# Altium PCB FlightController_Top_6x6.PcbDoc (part 1 of 6)
Units mm, origin at the board's own origin, x right, y up, seen from the top; angles counter-clockwise.
Board outline 149.8 x 149.8 mm, 2 copper layers (Top Layer, Bottom Layer); 156 components, 166 nets, 860 pads, 423 vias.
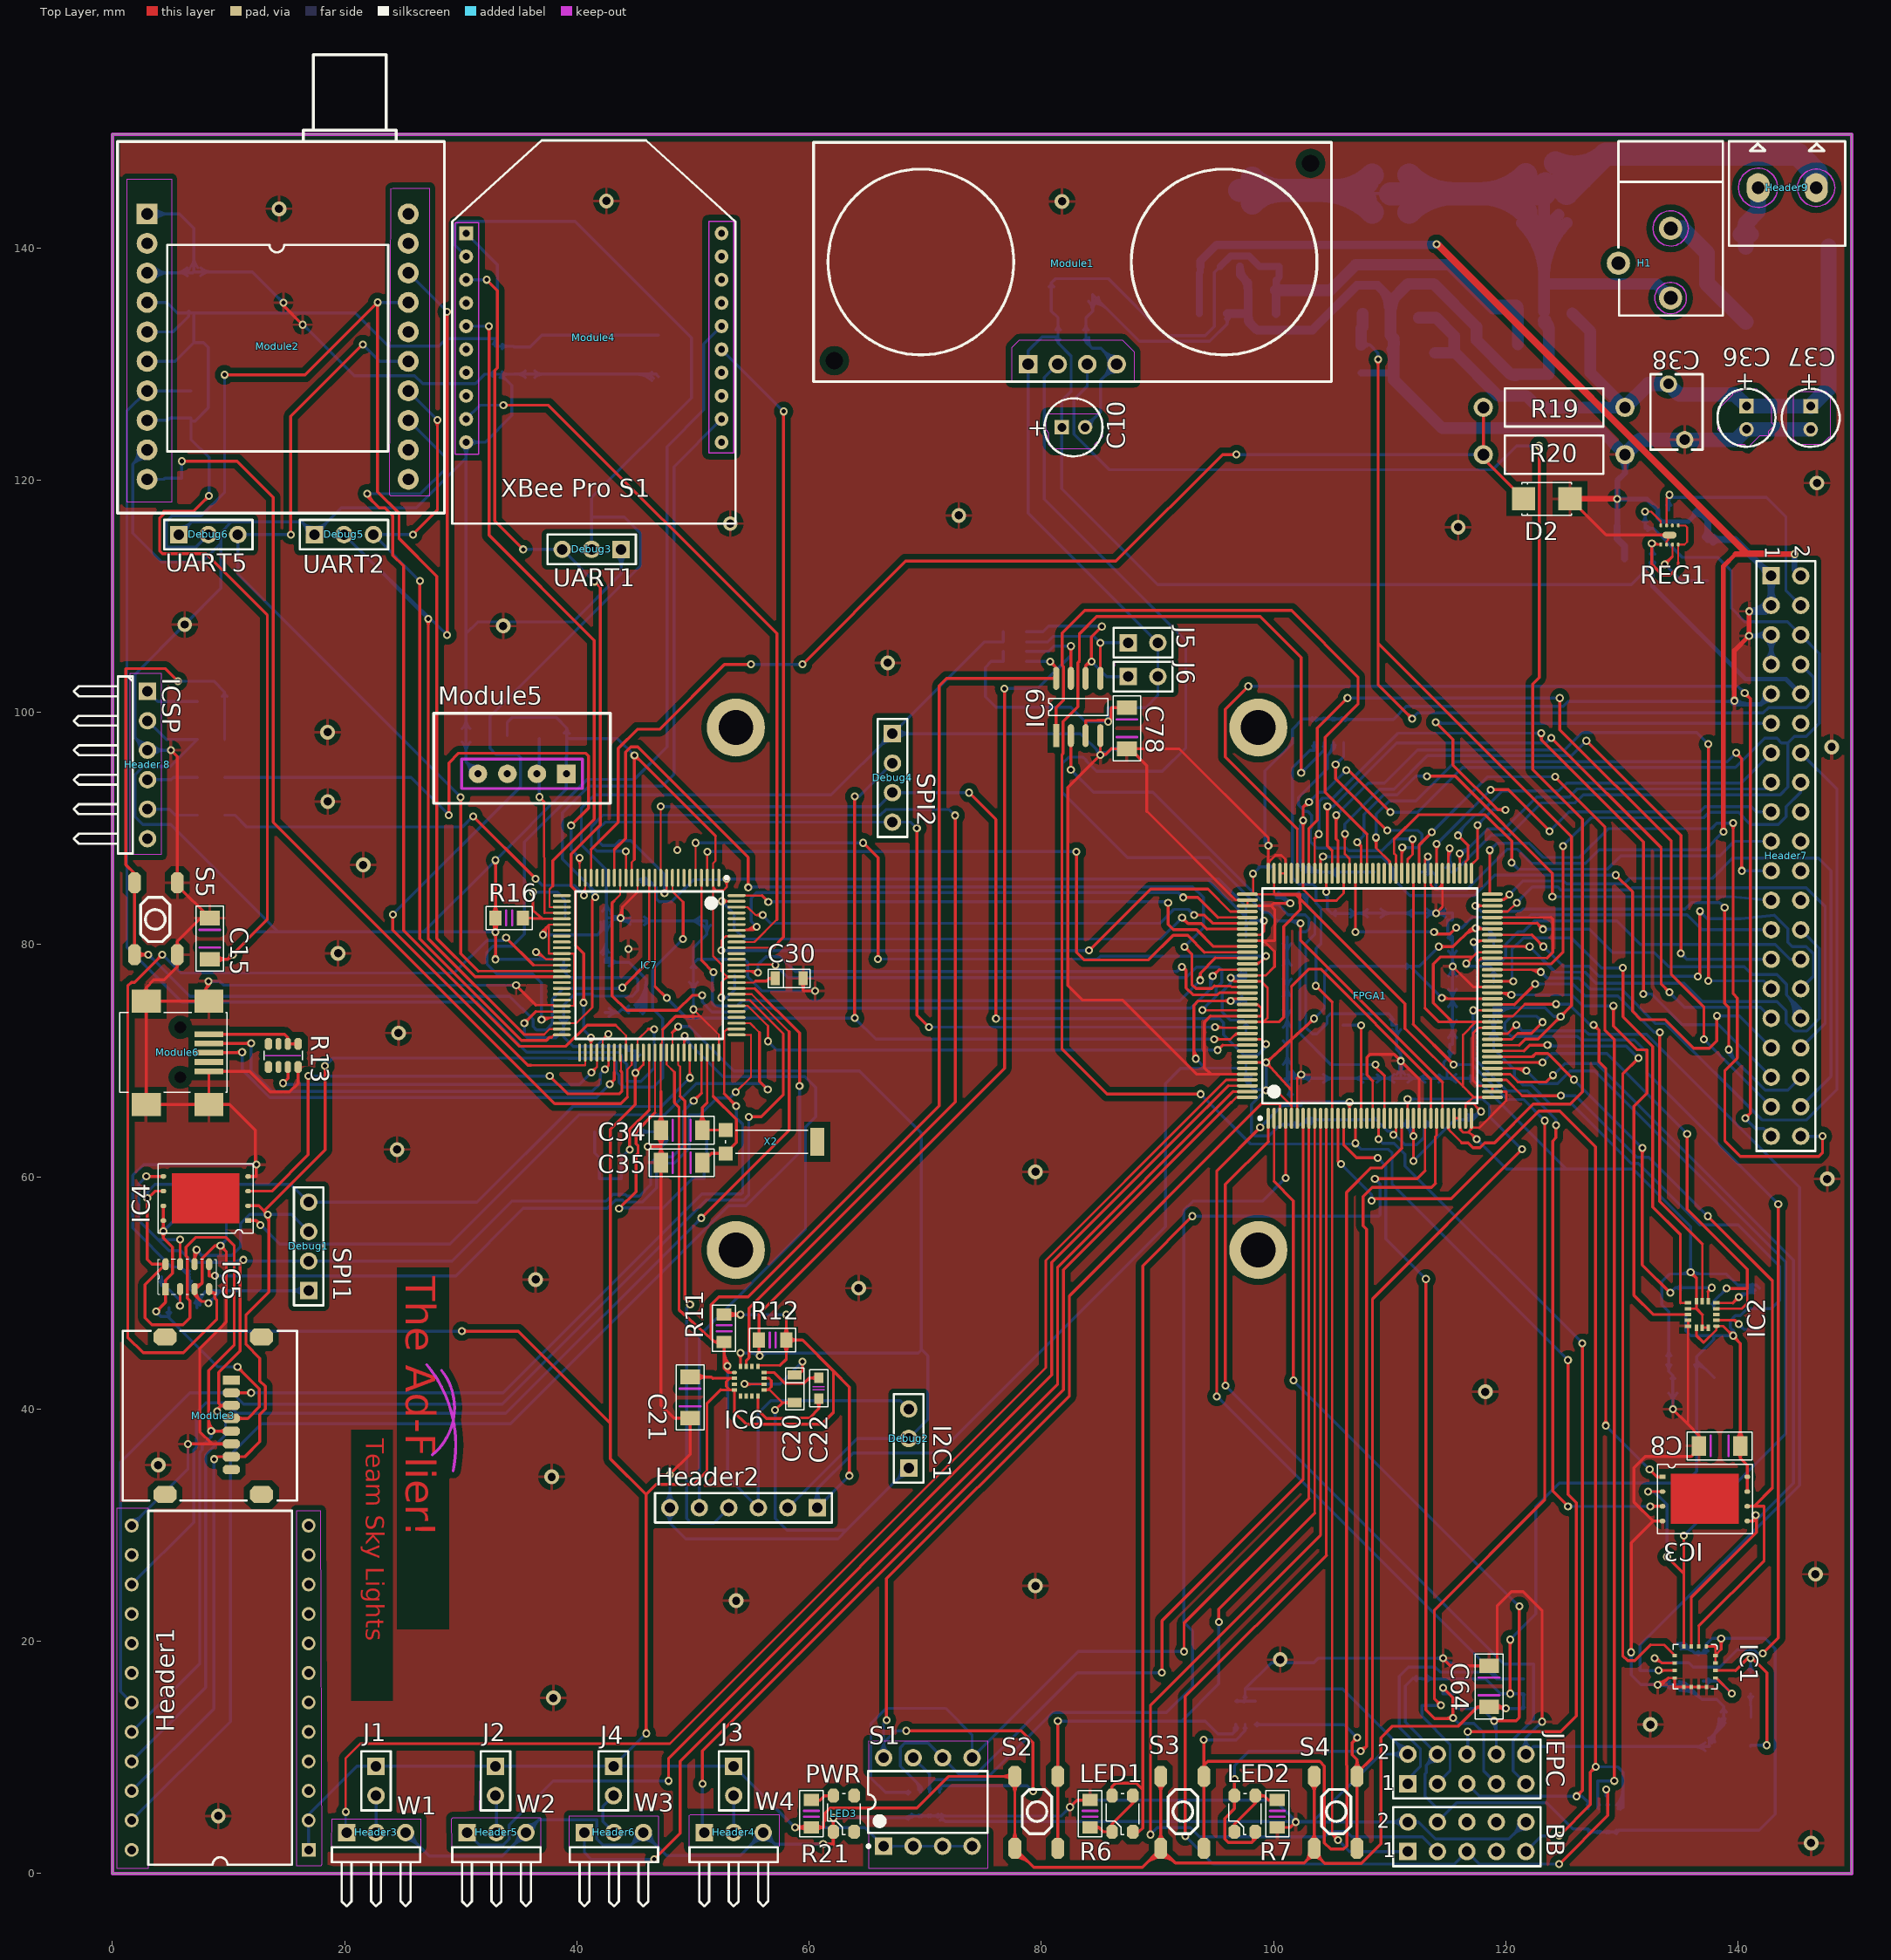
[diagram p0: Top Layer view]
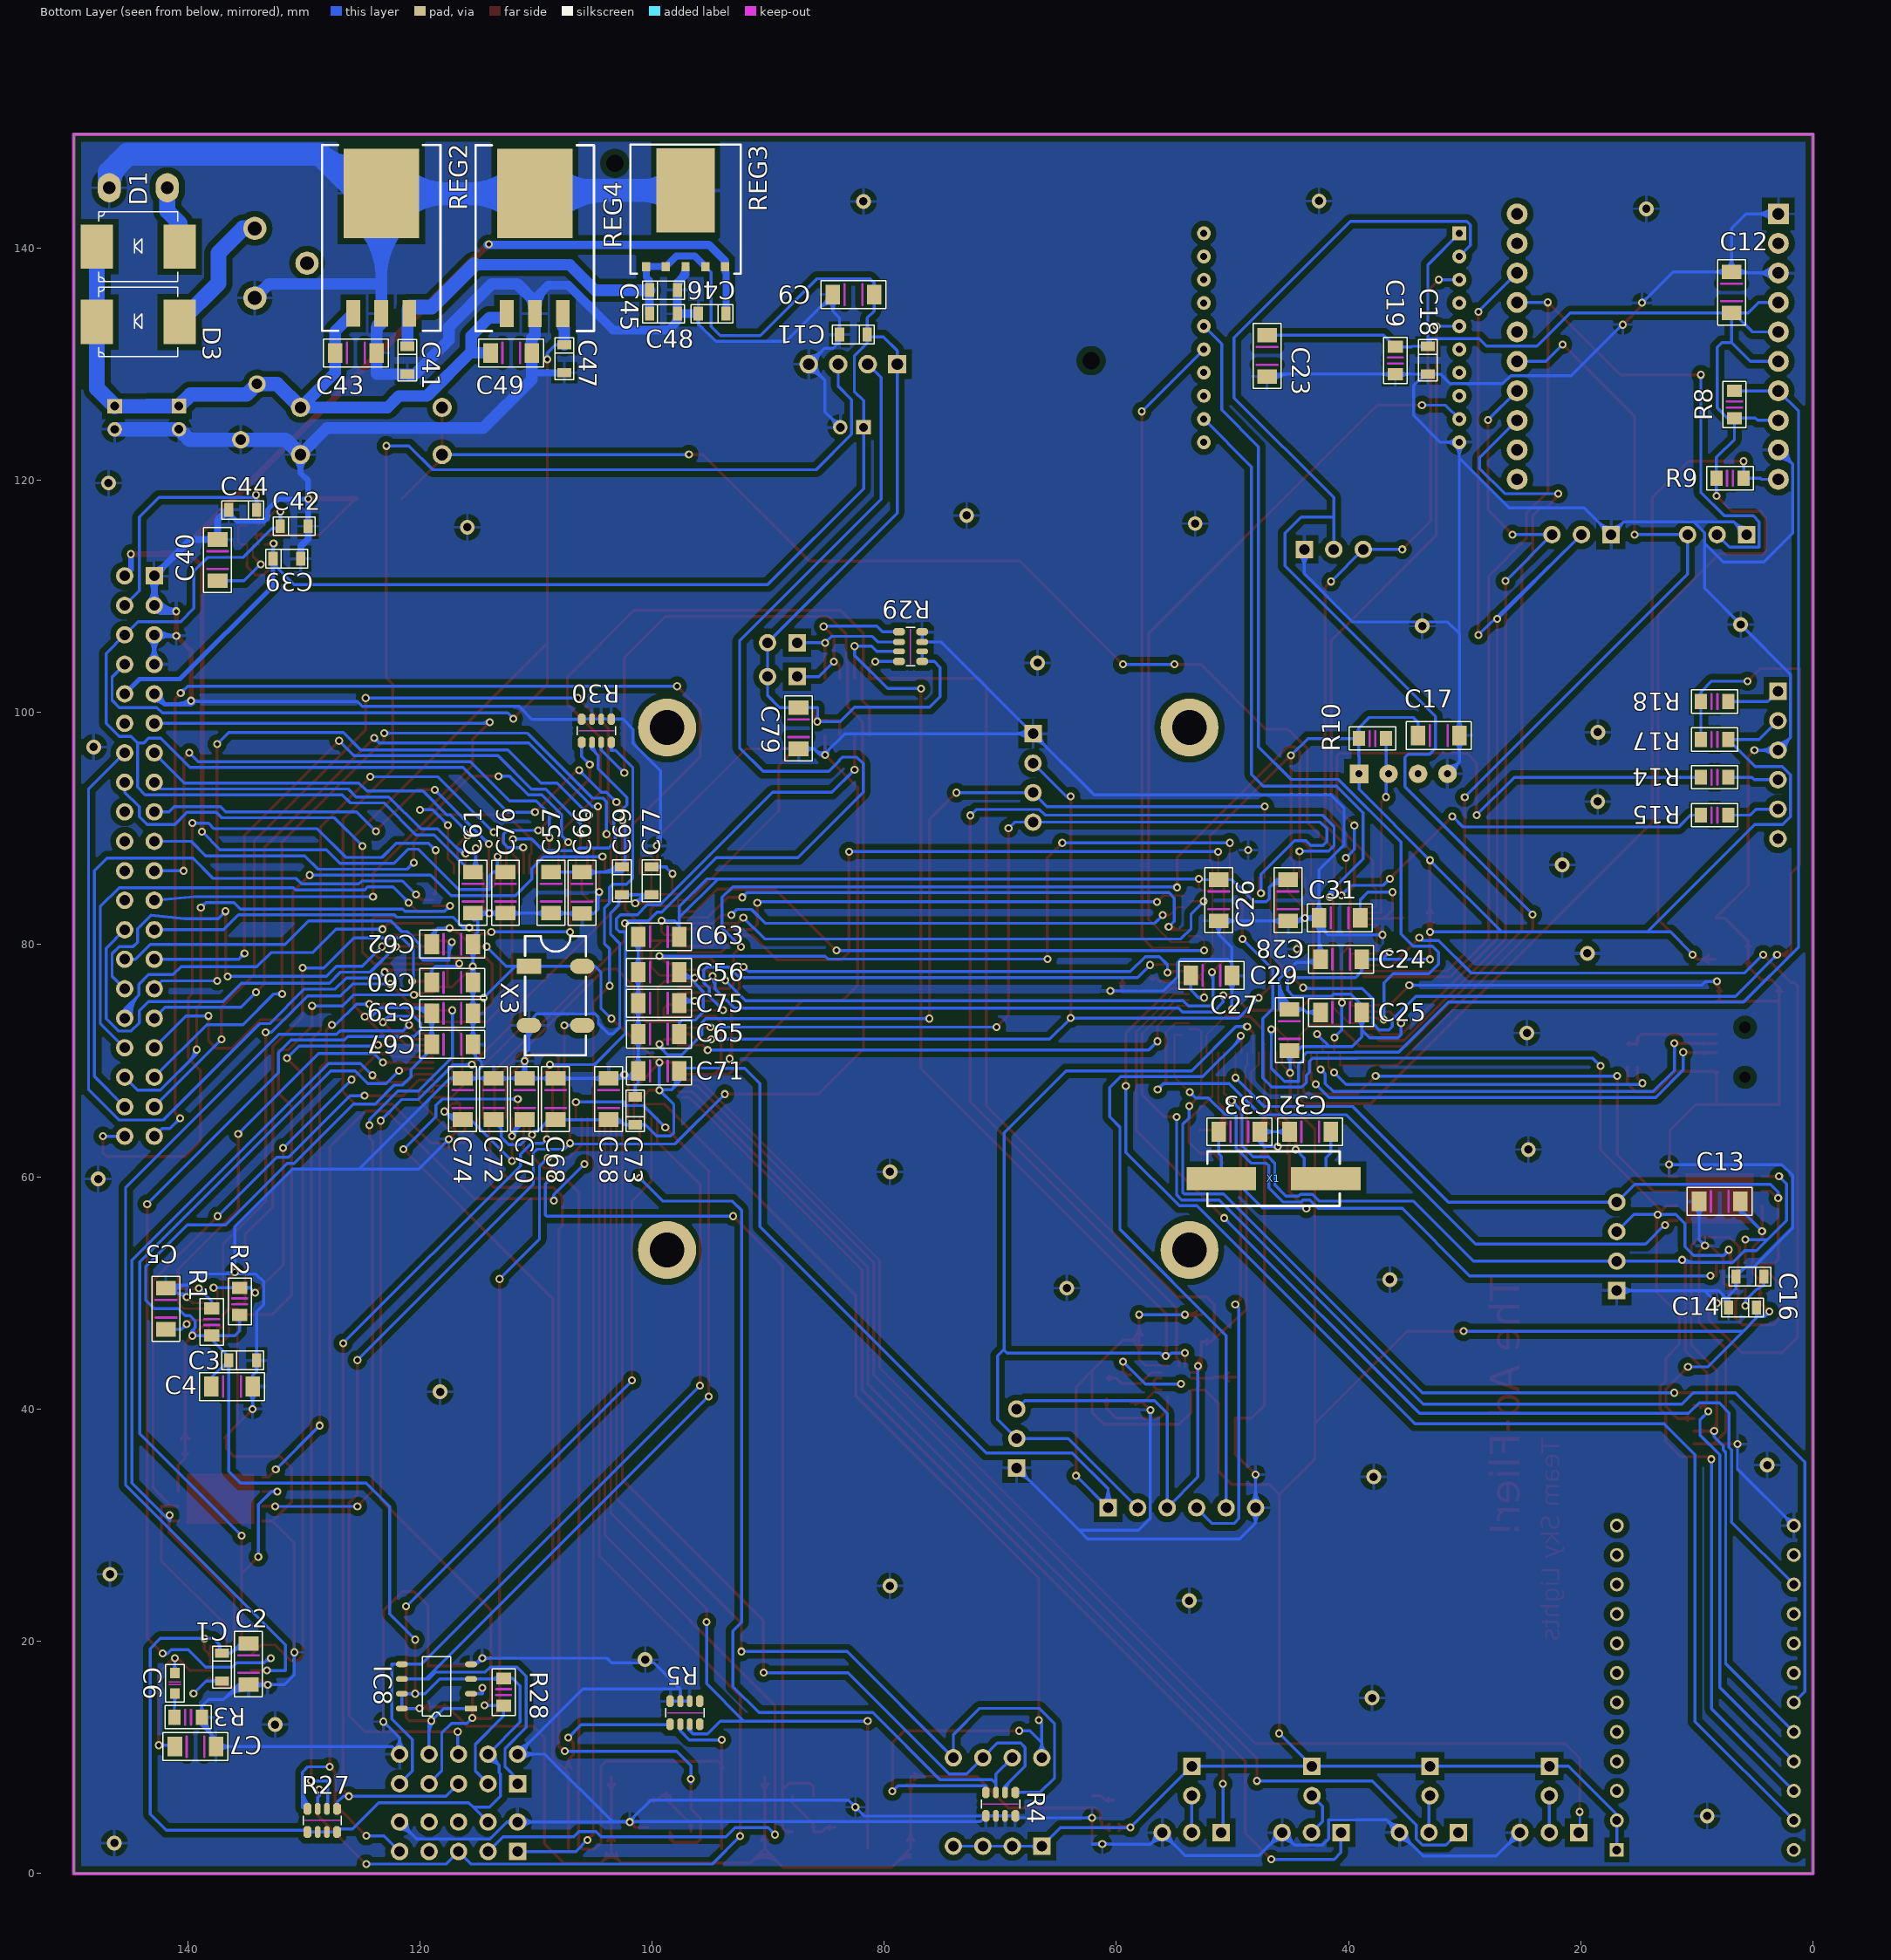
[diagram p1: Bottom Layer view, seen from below]

## Layer stack, top to bottom
Top Layer: signal copper 0.0356
Dielectric: dielectric 0.32, FR-4, Dk 4.8
Bottom Layer: signal copper 0.0356

## Board outline
0,0 149.8,0 149.8,149.8 0,149.8

## Design rules (kind name [scope] priority, off if disabled: settings)
Clearance Clearance_IsRegion [IsRegion] p1: gap=0.5
Clearance Clearance_IsPad [IsPad] p2: gap=0.2
Clearance [All] p3: gap=0.254
ComponentClearance [All] p1: gap=0.154 collisioncheckmode=3 verticalgap=0.154 showdistances=FALSE
DiffPairsRouting [All] p1: maxlimit=0.254 minlimit=0.254 mostfreqgap=0.254 maxuncoupledlength=12.7
FanoutControl Fanout_Default [All] p5: bgadir=Out bgaviamode=Centered fanoutstyle=Auto fanoutdirection=OutOnly viagrid=0.025 // Fanout_Default (Default Rule)
HoleSize [All] p1: absolutevalues=TRUE maxlimit=3 minlimit=0.381 maxpercent=80.000 minpercent=20.000
MinimumAnnularRing [Not IsVia] p1: minimumring=0.178
MinimumSolderMaskSliver [All] p1: minsoldermaskwidth=0.152
PolygonConnect [All] p1: connectstyle=Relief reliefconductorwidth=0.254 reliefentries=4 polygonreliefangle="90 Angle"
RoutingPriority RoutingPriority_Power [InNet('+3.3V') OR InNet('GND')] p1: routingpriority=0
RoutingPriority [All] p2: routingpriority=1
RoutingVias [All] p1: holewidth=0.381 width=0.686 viastyle="Through Hole" minholewidth=0.381 minwidth=0.686 maxholewidth=0.381 maxwidth=0.686
SMDNeckDown [All] p1: percent=70.000
SilkToSilkClearance [All] p1: silktosilkclearance=0.1
SilkscreenOverComponentPads [All] p1: minsilkscreentomaskgap=0.1
SolderMaskExpansion [All] p1: expansion=0
ViasUnderSMD [All] p1: allowed=FALSE
Width [All] p1: maxlimit=2 minlimit=0.154 preferedwidth=0.254 minimp=50.000000 maximp=50.000000 favimp=50.000000
20 further rules are at their usual default settings.

## Classes and differential pairs
component class "Components Class 1": C78 C79 IC9 J5 J6 R29
component class Power: 2 C36 C37 C38 C39 C40 C41 C42 C44 C45 C46 C47 C48 C49 D1 D2 D3 H1 Header9 LED3 R19 R20 R21 REG1 REG3 REG4
component class Navigator_Core: C24 C25 C26 C27 C28 C29 C30 C31 C32 C33 C34 C35 IC7 R16 R17 R18 S5 X1 X2
component class Navigator_Connectors: C23 Debug1 Debug2 Debug3 Debug4 Debug5 Debug6 "Header 8" Module6 R13 R14 R15
component class Navigator_Components: C12 C13 C14 C15 C16 C17 C18 C19 C20 C21 C22 Header1 Header2 IC4 IC5 IC6 Module2 Module3 Module4 Module5 R8 R9 R10 R11 R12
component class FPGA_Core: Header7
component class FPGA_Components: C1 C2 C3 C4 C5 C6 C7 C8 C9 C10 C11 Header3 Header4 Header5 Header6 IC1 IC2 IC3 J1 J2 J3 J4 LED1 LED2 Module1 R1 R2 R3 R4 R5 R6 R7 S1 S2 S3 S4
component class FPGA_Clocks: BB C56 C57 C58 C59 C60 C61 C62 C63 C64 C65 C66 C67 C68 C69 C70 C71 C72 C73 C74 C75 C76 C77 C78 C79 IC8 IC9 J5 J6 JEPC R27 R28 R29 R30 X3
net class Power: +3.3V GND
net class Other: 25MHZ_CLOCK +1.2V +1.5V +2.8V +5.0V ACCEL_INT1 ACCEL_INT2 ACCEL_SA0 ACCEL_SCL ACCEL_SDA ASDO BAROMETER_/CS BAROMETER_/SHDN BAROMETER_DIN BAROMETER_DOUT BAROMETER_SCLK BLED_BLUE1 BLED_BLUE2 BLED_BLUE3 BLED_BLUE4 BLED_ORANGE1 BLED_ORANGE2 BLED_ORANGE3 BLED_ORANGE4 BULTRASONIC_EDGE BULTRASONIC_TRIGGER CAMERA_DCLK CAMERA_DOUT0 CAMERA_DOUT1 CAMERA_DOUT2 CAMERA_DOUT3 CAMERA_DOUT4 CAMERA_DOUT5 CAMERA_DOUT6 CAMERA_DOUT7 CAMERA_EXTCLK CAMERA_HD CAMERA_RESET CAMERA_SCL CAMERA_SDA CAMERA_VD CLOCK_SYNTH_0 CLOCK_SYNTH_1 CONF_DONE CONFSWITCH_1 CONFSWITCH_2 CONFSWITCH_3 CONFSWITCH_4 CONFSWITCH_5 CONFSWITCH_6 CONFSWITCH_7 DATAO DCLK DS1085_SCL DS1085_SDA FPGA_A-/D FPGA_D0 FPGA_D1 FPGA_D2 FPGA_D3 FPGA_D4 FPGA_D5 FPGA_D6 FPGA_D7 FPGA_OK-IN FPGA_OK-OUT FPGA_R-/W FPGA_SPI_/GYROCS FPGA_SPI_/SRAMCS FPGA_SPI_CLOCK FPGA_SPI_DATAIN FPGA_SPI_DATAOUT FPGASRAM_/WP FULTRASONIC_EDGE FULTRASONIC_TRIGGER GPS_PPS GPS_RXA GPS_RXB GPS_TXA GPS_TXB GPS_XRST GPS_XSTBY GYRO_DRDY GYRO_INT1 HUMIDITY_I/O IC9_10K_C IC9_10K_D ICSP_MCLR ICSP_PGC ICSP_PGD MAGNET_DRDY MCLR MOTOR_W1 MOTOR_W2 MOTOR_W3 MOTOR_W4 MSEL0 MSEL1 NCE NCONFIG NCSO NetC1_2 NetC5_2 NetC6_1 NetC6_2 NetC16_1 NetC20_1 NetC22_1 NetC22_2 NetC30_1 NetC31_1 NetC40_2 NetD1_0 NetD3_0 NetHeader3_2 NetHeader4_2 NetHeader5_2 NetHeader6_2 "NetHeader 8_4" "NetHeader 8_5" NetLED1_2 NetLED2_2 NetLED3_1 NetModule6_4 NSTATUS OSC1 OSC2 P28 P30 P58 P104 P132 P133 P134 P135 P136 P137 P139 PIC_ACCEL_INT1 PIC_ACCEL_INT2 PIC_GYRO_/CS PIC_GYRO_DRDY PIC_GYRO_INT1 PIC_SRAM_/CS PIC_SRAM_/WP PIC_UART1_/CTS PIC_UART1_/RTS PIC_UART1_RX PIC_UART1_TX SOSCI SOSCO SYS SYSPOWMONITOR TCK TDI TDO TMS USB_PIC_N USB_PIC_P USD_/CS VBUS XBEE_/DTR XBEE_/RESET XBEE_ASSOCIATE
differential pair USB_PIC: +USB_PIC_P -USB_PIC_N

## Components (designator, comment, footprint, x,y, rotation, side; value= is the part's Value field where it differs from the comment)
BB "Header 5X2" HDR2X5 111.579,1.892 r0 top (schematic designator Header13)
C1 "10uF Low-ESR Tantalum CaseA" "CAPACITOR - TANTALUM CASE A" 137.033,17.78 r270 bottom
C2 "0.1uF SMD 1206" "SMD 1206" 134.747,18.034 r90 bottom
C3 "4.7uF Low-ESR Tantalum CaseA" "CAPACITOR - TANTALUM CASE A" 135.255,44.196 r180 bottom
C4 "0.1uF SMD 1206" "SMD 1206" 136.174,41.94 r180 bottom
C5 "0.1uF SMD 1206" "SMD 1206" 141.859,48.641 r270 bottom
C6 "470nF SMD 0603" "SMD 0603" 141.097,16.383 r270 bottom
C7 "0.1uF SMD 1206" "SMD 1206" 139.319,10.922 r180 bottom
C8 "0.1uF SMD 1206" "SMD 1206" 138.43,36.83 r180 top
C9 "0.1uF SMD 1206" "SMD 1206" 82.647,135.987 r180 bottom
C10 "10uF Electrolitic" CAPPR2-5x5 82.774,124.557 r0 top
C11 "1.0uF Low-ESR Tantalum CaseA" "CAPACITOR - TANTALUM CASE A" 82.647,132.558 r0 bottom
C12 "0.1uF SMD 1206" "SMD 1206" 7.015,136.174 r90 bottom
C13 "0.1uF SMD 1206" "SMD 1206" 8.031,57.882 r0 bottom
C14 "1.0uF Low-ESR Tantalum CaseA" "CAPACITOR - TANTALUM CASE A" 6.066,48.738 r0 bottom
C15 "0.1uF SMD 1206" "SMD 1206" 8.382,80.518 r270 top
C16 "1.0uF Low-ESR Tantalum CaseA" "CAPACITOR - TANTALUM CASE A" 5.431,51.405 r0 bottom
C17 "0.1uF SMD 1206" "SMD 1206" 32.228,98.014 r180 bottom
C18 "1.0uF Low-ESR Tantalum CaseA" "CAPACITOR - TANTALUM CASE A" 33.177,130.332 r270 bottom
C19 "8.2pF SMD 0805" "SMD 0805" 35.971,130.311 r90 bottom
C20 "4.7uF Low-ESR Tantalum CaseA" "CAPACITOR - TANTALUM CASE A" 58.771,41.753 r270 top
C21 "0.1uF SMD 1206" "SMD 1206" 49.754,40.991 r270 top
C22 "220nF SMD 0603" "SMD 0603" 60.833,41.783 r270 top
C23 "0.1uF SMD 1206" "SMD 1206" 47.02,130.713 r90 bottom
C24 "0.1uF SMD 1206" "SMD 1206" 40.641,78.74 r0 bottom
C25 "0.1uF SMD 1206" "SMD 1206" 40.641,74.168 r0 bottom
C26 "0.1uF SMD 1206" "SMD 1206" 51.182,83.82 r270 bottom
C27 "0.1uF SMD 1206" "SMD 1206" 45.086,72.644 r90 bottom
C28 "0.1uF SMD 1206" "SMD 1206" 45.213,83.82 r270 bottom
C29 "0.1uF SMD 1206" "SMD 1206" 51.817,77.343 r180 bottom
C30 "10uF Low-ESR Tantalum CaseA" "CAPACITOR - TANTALUM CASE A" 58.294,77.089 r0 top
C31 "0.1uF SMD 1206" "SMD 1206" 40.768,82.296 r0 bottom
C32 "22pF SMD 1206" "SMD 1206" 43.308,63.881 r180 bottom
C33 "22pF SMD 1206" "SMD 1206" 49.404,63.881 r0 bottom
C34 "22pF SMD 1206" "SMD 1206" 49.023,64.008 r0 top
C35 "22pF SMD 1206" "SMD 1206" 49.023,61.214 r0 top
C36 "1.0uF Electrolitic" CAPPR2-5x5 140.744,125.386 r270 top
C37 "10uF Electrolitic" CAPPR2-5x5 146.274,125.379 r270 top
C38 "0.1uF Ceramic" CAPRD5-6.5x4.5 134.717,125.887 r90 top
C39 "1.0uF Low-ESR Tantalum CaseA" "CAPACITOR - TANTALUM CASE A" 131.445,113.246 r180 bottom
C40 "0.1uF SMD 1206" "SMD 1206" 137.414,113.119 r270 bottom
C41 "10uF Low-ESR Tantalum CaseA" "CAPACITOR - TANTALUM CASE A" 121.061,130.332 r270 bottom
C42 "1.0uF Low-ESR Tantalum CaseA" "CAPACITOR - TANTALUM CASE A" 130.81,116.04 r180 bottom
C43 "0.1uF SMD 1206" "SMD 1206" 125.506,130.967 r180 bottom
C44 "1.0uF Low-ESR Tantalum CaseA" "CAPACITOR - TANTALUM CASE A" 135.255,117.437 r0 bottom
C45 "1.0uF Low-ESR Tantalum CaseA" "CAPACITOR - TANTALUM CASE A" 99.009,136.368 r180 bottom
C46 "10uF Low-ESR Tantalum CaseA" "CAPACITOR - TANTALUM CASE A" 94.818,134.336 r0 bottom
C47 "10uF Low-ESR Tantalum CaseA" "CAPACITOR - TANTALUM CASE A" 107.549,130.459 r270 bottom
C48 "1.0uF Low-ESR Tantalum CaseA" "CAPACITOR - TANTALUM CASE A" 99.009,134.336 r180 bottom
C49 "0.1uF SMD 1206" "SMD 1206" 112.121,130.967 r0 bottom
C56 "0.1uF SMD 1206" "SMD 1206" 99.412,77.626 r0 bottom
C57 "0.1uF SMD 1206" "SMD 1206" 108.683,84.484 r270 bottom
C58 "0.1uF SMD 1206" "SMD 1206" 103.73,66.704 r90 bottom
C59 "0.1uF SMD 1206" "SMD 1206" 117.192,74.07 r180 bottom
C60 "0.1uF SMD 1206" "SMD 1206" 117.192,76.737 r180 bottom
C61 "0.1uF SMD 1206" "SMD 1206" 115.414,84.484 r270 bottom
C62 "0.1uF SMD 1206" "SMD 1206" 117.192,80.039 r180 bottom
C63 "0.1uF SMD 1206" "SMD 1206" 99.412,80.674 r0 bottom
C64 "0.1uF SMD 1206" "SMD 1206" 118.564,16.116 r90 top
C65 "0.1uF SMD 1206" "SMD 1206" 99.412,72.292 r0 bottom
C66 "0.1uF SMD 1206" "SMD 1206" 106.016,84.467 r270 bottom
C67 "0.1uF SMD 1206" "SMD 1206" 117.192,71.403 r180 bottom
C68 "0.1uF SMD 1206" "SMD 1206" 108.302,66.704 r90 bottom
C69 "1.0uF Low-ESR Tantalum CaseA" "CAPACITOR - TANTALUM CASE A" 102.587,85.5 r270 bottom
C70 "0.1uF SMD 1206" "SMD 1206" 110.969,66.704 r90 bottom
C71 "0.1uF SMD 1206" "SMD 1206" 99.412,69.117 r0 bottom
C72 "0.1uF SMD 1206" "SMD 1206" 113.636,66.704 r90 bottom
C73 "1.0uF Low-ESR Tantalum CaseA" "CAPACITOR - TANTALUM CASE A" 101.444,65.688 r90 bottom
C74 "0.1uF SMD 1206" "SMD 1206" 116.303,66.704 r90 bottom
C75 "0.1uF SMD 1206" "SMD 1206" 99.412,74.959 r0 bottom
C76 "0.1uF SMD 1206" "SMD 1206" 112.62,84.484 r270 bottom
C77 "1.0uF Low-ESR Tantalum CaseA" "CAPACITOR - TANTALUM CASE A" 100.047,85.5 r270 bottom
C78 "0.1uF SMD 1206" "SMD 1206" 87.376,98.639 r90 top
C79 "10nF SMD 1206" "SMD 1206" 87.376,98.639 r90 bottom
D1 "MBRS540T3G" MBRS540T3G 144.242,140.111 r180 bottom
D2 "1SMAS913BT3G" 1SMA5913BT3G 123.541,118.394 r0 top
D3 "MBRS540T3G" MBRS540T3G 144.242,133.634 r180 bottom
Debug1 "SPI1" HDR1X4 16.897,50.202 r90 top
Debug2 "I2C1" HDR1X3 68.58,34.925 r90 top
Debug3 "UART1" HDR1X3 43.815,114.046 r180 top
Debug4 "SPI2" HDR1X4 67.183,98.171 r270 top
Debug5 "UART2" HDR1X3 17.399,115.316 r0 top
Debug6 "UART5" HDR1X3 5.715,115.316 r0 top
FPGA1 "EP2C8T144C8N" TQFP144_N 108.302,75.594 r90 top
H1 "DC Jack" "DC POWER JACK" 134.209,149.191 r90 top
Header1 "L3G4200D Header" DIP24 16.891,2.032 r180 top
Header2 "Header 6" HDR1X6 60.706,31.496 r180 top
Header3 "W1" HDR1X3H 20.163,3.526 r0 top
Header4 "W4" HDR1X3H 50.969,3.526 r0 top
Header5 "W2" HDR1X3H 30.535,3.526 r0 top
Header6 "W3" HDR1X3H 40.652,3.526 r0 top
Header7 "Header 20X2H" HDR2X20 142.875,111.76 r270 top
Header9 "Battery Conn" "PC WIRE CONNECTOR" 144.242,145.191 r0 top
"Header 8" "ICSP" HDR1X6H 3.018,101.824 r270 top (schematic designator Header8)
IC1 "L3G4200D" L3G4200DTR 137.287,19.558 r270 top
IC2 "MMA8452Q" MMA8452QT 136.936,48.144 r180 top
IC3 "S25FL128P" S25FL128P 137.16,32.258 r0 top
IC4 "S25FL128P" S25FL128P 8.031,58.136 r180 top
IC5 "MPL115A1" MPL115A1 6.447,51.405 r90 top
IC6 "HMC5883L" HMC5883L-TR 53.564,43.15 r0 top
IC7 "PIC32MX795F512L-80I/PT" TQFP-PF100_L 46.229,78.232 r270 top
IC8 "EPCS16SI8N" "EPCS16SI8N SO-8" 116.089,14.211 r0 bottom
IC9 "DS1085" "DS1085 SO-150MIL" 81.28,98.004 r90 top
J1 "Jumper" HDR1X2 22.703,9.241 r270 top
J2 "Jumper" HDR1X2 32.99,9.241 r270 top
J3 "Jumper" HDR1X2 53.509,9.241 r270 top
J4 "Jumper" HDR1X2 43.15,9.241 r270 top
J5 "Jumper" HDR1X2 87.503,106.005 r0 top
J6 "Jumper" HDR1X2 87.503,103.084 r0 top
JEPC "Header 5X2" HDR2X5 111.579,7.734 r0 top (schematic designator Header12)
LED1 "LED PLCC-4" "PLCC-4 LED" 86.995,5.143 r90 top
LED2 "LED PLCC-4" "PLCC-4 LED" 97.536,5.143 r90 top
LED3 "PWR" "PLCC-4 LED" 62.992,5.143 r90 top
Module1 "HC-SR04 Ultrasonic Module" "HC-SR04 ULTRASONIC RANGER" 104.999,128.494 r180 top
Module2 "Copernicus II DIP Module" "COPERNICUS GPS MODULE" 0.441,149.158 r0 top
Module3 "MicroSD Socket" "MICROSD CARD SLOT" 0.889,32.639 r90 top
Module4 "XBee Pro S1" "XBEE PRO S1 WIRELESS MODULE" 41.462,132.267 r0 top
Module5 "RHT03" "RHT03 HUMIDITY SENSOR" 42.896,92.172 r180 top
Module6 "Mini-USB" "MINI B USB CONNECTOR" 0.605,74.138 r270 top
R1 "4.7K SMD 0805" "SMD 0805" 137.922,47.498 r270 bottom
R2 "4.7K SMD 0805" "SMD 0805" 135.509,49.276 r90 bottom
R3 "10K SMD 0805" "SMD 0805" 139.954,13.462 r180 bottom
R4 "Value: 10K SMD Resistor Array" "RESISTOR ARRAY YC164" 69.977,5.969 r270 bottom
R5 "Value: 10K SMD Resistor Array" "RESISTOR ARRAY YC164" 97.155,13.843 r90 bottom
R6 "1K SMD 0805" "SMD 0805" 84.201,5.143 r90 top
R7 "1K SMD 0805" "SMD 0805" 100.33,5.143 r270 top
R8 "10K SMD 0805" "SMD 0805" 6.761,126.522 r90 bottom
R9 "10K SMD 0805" "SMD 0805" 7.142,120.172 r180 bottom
R10 "1K SMD 0805" "SMD 0805" 37.943,97.76 r0 bottom
R11 "2.2K SMD 0805" "SMD 0805" 52.675,46.96 r90 top
R12 "2.2K SMD 0805" "SMD 0805" 56.866,45.944 r0 top
R13 "Value: 10K SMD Resistor Array" "RESISTOR ARRAY YC164" 14.702,70.455 r270 top
R14 "100 SMD 0805" "SMD 0805" 8.479,94.416 r0 bottom
R15 "100 SMD 0805" "SMD 0805" 8.479,91.156 r0 bottom
R16 "10 SMD 0805" "SMD 0805" 34.164,82.296 r180 top
R17 "10K SMD 0805" "SMD 0805" 8.479,97.675 r180 bottom
R18 "100 SMD 0805" "SMD 0805" 8.479,100.935 r180 bottom
R19 "3.9K Radial" RES12.2-8.5X3.3 124.176,126.268 r0 top
R20 "1.3K Radial" RES12.2-8.5X3.3 124.176,122.204 r180 top
R21 "1K SMD 0805" "SMD 0805" 60.198,5.143 r270 top
R27 "Value: 10K SMD Resistor Array" "RESISTOR ARRAY YC164" 128.397,4.572 r270 bottom
R28 "10K SMD 0805" "SMD 0805" 112.776,15.621 r270 bottom
R29 "Value: 10K SMD Resistor Array" "RESISTOR ARRAY YC164" 77.724,105.664 r0 bottom
R30 "Value: 10K SMD Resistor Array" "RESISTOR ARRAY YC164" 104.775,98.425 r90 bottom
REG1 "MIC5330-MFYML" "MIC5330-MFYML TR" 134.112,115.278 r90 top
REG2 "MIC29300-5.0WU" "TO-263 D2PACK" 123.317,134.366 r90 bottom
REG3 "MIC49300-1.2WR" "MIC49300-1.2WR SPACK-5" 97.104,138.4 r90 bottom
REG4 "MIC29300-3.3WU" "TO-263 D2PACK" 110.089,134.35 r90 bottom
S1 "SW-DIP4" DIP-8 70.231,6.159 r90 top
S2 "SMD Tactile Switch" "SMD TACTILE SWITCH" 77.724,2.159 r90 top
S3 "SMD Tactile Switch" "SMD TACTILE SWITCH" 90.297,2.159 r90 top
S4 "SMD Tactile Switch" "SMD TACTILE SWITCH" 103.505,2.159 r90 top
S5 "SMD Tactile Switch" "SMD TACTILE SWITCH" 5.588,85.344 r270 top
X1 "XT9M20ANA8M" "XT9M20ANA8M - 8MHZ CAPACITOR" 46.453,59.847 r180 bottom
X2 "SSP-T6-7PF-20PPM" "32.768KHZ CRYSTAL" 52.803,63.021 r270 top
X3 "SE2838CT-ND" "SG-636PCE 25.175MHZ CRYSTAL" 108.302,75.594 r180 bottom

## Footprints (in the part's own frame and the unit in brackets; to place one, negate y for a bottom-side part, rotate by r counter-clockwise, add the part's x,y. Pads: shape width x height; smd on the part's side, far side on the other; paste and mask are expansions set on the pad)
1SMA5913BT3G [mm]
  rect 2x2 smd: A(2,0) K(-2,0)
  silkscreen extent -2.16,-1.4 2.13,1.4
"32.768KHZ CRYSTAL" [mm]
  rect 1.2x1.2 smd: 1(-1,0) 2(1,0)
  rect 2.4x1.2 smd: NC(0,7.9)
  silkscreen extent -1,0 1,7.11
"CAPACITOR - TANTALUM CASE A" [mm]
  rect 0.8x1.2 smd: 1(-1.2,0) 2(1.2,0)
  silkscreen extent -1.8,-0.8 1.8,0.8
CAPPR2-5x5 [mm] "Capacitor, Electrolytic, Radial; Body 5 x 5 mm (Dia.xH typ); Pin Spacing 2 mm (typ)"
  rect 1.25x1.25 hole 0.75: 1(-1,0)
  round 1.25 hole 0.75: 2(1,0)
  silkscreen extent -2.5,-2.5 2.5,2.5
CAPRD5-6.5x4.5 [mm] "Capacitor, Ceramic, Thru-Hole, Disc; Body 6.5 x 4.5 mm (LxW max) Pin Spacing 5 mm (typ)"
  round 1.5 hole 0.9: 1(-2.4,-0.7) 2(2.4,0.7)
  silkscreen extent -3.25,-2.25 3.25,2.25
"COPERNICUS GPS MODULE" [mm]
  rect 1.8x1.8 hole 1: 1(2.54,-6.223)
  round 1.8 hole 1: 2(2.54,-8.763) 3(2.54,-11.303) 4(2.54,-13.843) 5(2.54,-16.383) 6(2.54,-18.923) 7(2.54,-21.463) 8(2.54,-24.003) 9(2.54,-26.543) 10(2.54,-29.083) 11(25.04,-29.083) 12(25.04,-26.543) 13(25.04,-24.003) 14(25.04,-21.463) 15(25.04,-18.923) 16(25.04,-16.383) 17(25.04,-13.843) 18(25.04,-11.303) 19(25.04,-8.763) 20(25.04,-6.223)
  silkscreen extent 0,-32 28.15,7.5
"DC POWER JACK" [mm]
  round 2 hole 1.2: IN(-7.5,0) NC(-10.5,4.5) OUT(-13.5,0)
  Top Layer keep-out circle w0.1: c-7.5,0 r1.517
  Top Layer keep-out circle w0.1: c-13.5,0 r1.359
  silkscreen extent -15,-4.5 0,4.5
DIP24 [mm]
  rect 1.2x1.2 hole 0.75: 1(0,0)
  round 1.2 hole 0.75: 2(0,-2.54) 3(0,-5.08) 4(0,-7.62) 5(0,-10.16) 6(0,-12.7) 7(0,-15.24) 8(0,-17.78) 9(0,-20.32) 10(0,-22.86) 11(0,-25.4) 12(0,-27.94) 13(15.24,-27.94) 14(15.24,-25.4) 15(15.24,-22.86) 16(15.24,-20.32) 17(15.24,-17.78) 18(15.24,-15.24) 19(15.24,-12.7) 20(15.24,-10.16) 21(15.24,-7.62) 22(15.24,-5.08) 23(15.24,-2.54) 24(15.24,0)
  silkscreen extent 1.43,-29.21 13.8,1.27
DIP-8 [mm] "DIP; 8 Leads; Row Spacing 7.62 mm; Pitch 2.54 mm"
  rect 1.5x1.5 hole 0.9: 1(-3.81,3.81)
  round 1.5 hole 0.9: 2(-3.81,1.27) 3(-3.81,-1.27) 4(-3.81,-3.81) 5(3.81,-3.81) 6(3.81,-1.27) 7(3.81,1.27) 8(3.81,3.81)
  silkscreen extent -3.93,-5.15 2.65,5.23, body extent -3.6,-5.15 3.6,5.15, height 5.08
"DS1085 SO-150MIL" [mm]
  rect 1.98x0.53 smd: 1(0,0)
  oval 1.98x0.53 smd: 2(0,-1.27) 3(0,-2.54) 4(0,-3.81) 5(4.93,-3.81) 6(4.93,-2.54) 7(4.93,-1.27) 8(4.93,0)
  silkscreen extent 1.73,-4.44 3.21,0.64
"EPCS16SI8N SO-8" [mm]
  rect 1.04x0.5 smd: 1(-0.5,0)
  oval 1.04x0.5 smd: 2(-0.5,-1.27) 3(-0.5,-2.54) 4(-0.5,-3.81) 5(5.45,-3.81) 6(5.45,-2.54) 7(5.45,-1.27) 8(5.45,0)
  silkscreen extent 1.26,-4.44 3.69,0.64
"HC-SR04 ULTRASONIC RANGER" [mm]
  rect 1.6x1.6 hole 1: 1(26.12,-1.5)
  round 1.6 hole 1: 2(23.58,-1.5) 3(21.04,-1.5) 4(18.5,-1.5)
  round 0 hole 1.5: NC(1.8,-18.8) NC(42.82,-1.8)
  silkscreen extent 0,-20.6 44.62,0
HDR1X2 [mm] "Connector; Header; 2 Position"
  rect 1.5x1.5 hole 0.9: 1(0,0)
  round 1.5 hole 0.9: 2(2.54,0)
  silkscreen extent -1.27,-1.27 3.81,1.27
HDR1X3 [mm] "Connector; Header; 3 Position"
  rect 1.5x1.5 hole 0.9: 1(0,0)
  round 1.5 hole 0.9: 2(2.54,0) 3(5.08,0)
  silkscreen extent -1.27,-1.27 6.35,1.27
HDR1X3H [mm] "Connector; Header; 3 Position; Right Angle"
  rect 1.5x1.5 hole 0.9: 1(0,0)
  round 1.5 hole 0.9: 2(2.54,0) 3(5.08,0)
  silkscreen extent -1.27,-6.35 6.35,-1.27
HDR1X4 [mm] "Connector; Header; 4 Position"
  rect 1.5x1.5 hole 0.9: 1(0,0)
  round 1.5 hole 0.9: 2(2.54,0) 3(5.08,0) 4(7.62,0)
  silkscreen extent -1.27,-1.27 8.89,1.27
HDR1X6 [mm] "Connector; Header; 6 Position"
  rect 1.5x1.5 hole 0.9: 1(0,0)
  round 1.5 hole 0.9: 2(2.54,0) 3(5.08,0) 4(7.62,0) 5(10.16,0) 6(12.7,0)
  silkscreen extent -1.27,-1.27 13.97,1.27
HDR1X6H [mm] "Connector; Header; 6 Position; Right Angle"
  rect 1.5x1.5 hole 0.9: 1(0,0)
  round 1.5 hole 0.9: 2(2.54,0) 3(5.08,0) 4(7.62,0) 5(10.16,0) 6(12.7,0)
  silkscreen extent -1.27,-6.35 13.97,-1.27
HDR2X5 [mm] "Connector; Header; 5x2 Position"
  rect 1.5x1.5 hole 0.9: 1(0,0)
  round 1.5 hole 0.9: 2(0,2.54) 3(2.54,0) 4(2.54,2.54) 5(5.08,0) 6(5.08,2.54) 7(7.62,0) 8(7.62,2.54) 9(10.16,0) 10(10.16,2.54)
  silkscreen extent -1.27,-1.27 11.43,3.81
HDR2X20 [mm] "Connector; Header; 20x2 Position"
  rect 1.5x1.5 hole 0.9: 1(0,0)
  round 1.5 hole 0.9: 2(0,2.54) 3(2.54,0) 4(2.54,2.54) 5(5.08,0) 6(5.08,2.54) 7(7.62,0) 8(7.62,2.54) 9(10.16,0) 10(10.16,2.54) 11(12.7,0) 12(12.7,2.54) 13(15.24,0) 14(15.24,2.54) 15(17.78,0) 16(17.78,2.54) 17(20.32,0) 18(20.32,2.54) 19(22.86,0) 20(22.86,2.54) 21(25.4,0) 22(25.4,2.54) 23(27.94,0) 24(27.94,2.54) 25(30.48,0) 26(30.48,2.54) 27(33.02,0) 28(33.02,2.54) 29(35.56,0) 30(35.56,2.54) 31(38.1,0) 32(38.1,2.54) 33(40.64,0) 34(40.64,2.54) 35(43.18,0) 36(43.18,2.54) 37(45.72,0) 38(45.72,2.54) 39(48.26,0) 40(48.26,2.54)
  silkscreen extent -1.27,-1.27 49.53,3.81
HMC5883L-TR [mm]
  oval 0.45x0.3 smd: 1(0,0)
  rect 0.45x0.3 smd: 2(0,-0.5) 3(0,-1) 4(0,-1.5) 9(2.55,-1.5) 10(2.55,-1) 11(2.55,-0.5) 12(2.55,0)
  rect 0.3x0.45 smd: 5(0.525,-2.025) 6(1.025,-2.025) 7(1.525,-2.025) 8(2.025,-2.025) 13(2.025,0.525) 14(1.525,0.525) 15(1.025,0.525) 16(0.525,0.525)
L3G4200DTR [mm]
  oval 0.4x0.3 smd: 1(0,0)
  rect 0.4x0.3 smd: 2(0,-0.65) 3(0,-1.3) 4(0,-1.95) 9(3.5,-1.95) 10(3.5,-1.3) 11(3.5,-0.65) 12(3.5,0)
  rect 0.3x0.4 smd: 5(0.775,-2.725) 6(1.425,-2.725) 7(2.075,-2.725) 8(2.725,-2.725) 13(2.725,0.775) 14(2.075,0.775) 15(1.425,0.775) 16(0.775,0.775)
  silkscreen extent -0.15,-2.88 3.65,0.93
MBRS540T3G [mil]
  rect 110x150 smd: A(140.49,0) K(-140.47,0)
  silkscreen extent -134,-118 134,118
"MIC5330-MFYML TR" [mm]
  rect 0.35x0.25 smd: 1(-0.825,0.75)
  oval 0.35x0.25 smd: 2(-0.825,0.25) 3(-0.825,-0.25) 4(-0.825,-0.75) 5(0.825,-0.75) 6(0.825,-0.25) 7(0.825,0.25) 8(0.825,0.75)
  oval 0.6x1.2 smd: 2(0,0)
"MIC49300-1.2WR SPACK-5" [mm]
  rect 0.8x0.7 smd: 1(0,3.4) 2(0,1.7) 3(0,0) 4(0,-1.7) 5(0,-3.4)
  rect 7.25x5 smd: 3(6.555,0)
  silkscreen extent -0.62,-4.75 10.5,4.75
"MICROSD CARD SLOT" [mm]
  rect 0.8x1.5 smd: 1(9.859,-9.35)
  oct 0.8x1.5 smd: 2(8.759,-9.35) 3(7.659,-9.35) 4(6.559,-9.35) 5(5.459,-9.35) 6(4.359,-9.35) 7(3.259,-9.35) 8(2.159,-9.35)
  oct 1.45x2 smd: SHLD(0,-3.65) SHLD(0,-11.95) SHLD(13.56,-11.95) SHLD(13.56,-3.65)
  silkscreen extent -0.51,-15 14.1,0
"MINI B USB CONNECTOR" [mm]
  rect 2x2.5 smd: 1(-1,7.7) 1(-1,2.3) 1(7.9,7.7) 1(7.9,2.3)
  rect 0.5x2.5 smd: 1(5.05,7.7) 2(4.25,7.7) 3(3.45,7.7) 4(2.65,7.7) 5(1.85,7.7)
  round 0 hole 1: NC(1.25,5.25) NC(5.56,5.25)
  silkscreen extent 0,0 6.86,9.27
MMA8452QT [mm]
  oval 0.567x0.3 smd: 1(-1.217,1)
  rect 0.567x0.3 smd: 2(-1.217,0.5) 3(-1.217,0) 4(-1.217,-0.5) 5(-1.217,-1) 9(1.217,-1) 10(1.217,-0.5) 11(1.217,0) 12(1.217,0.5) 13(1.217,1)
  rect 0.3x0.567 smd: 6(-0.5,-1.134) 7(0,-1.134) 8(0.5,-1.134) 14(0.5,1.134) 15(0,1.134) 16(-0.5,1.134)
MPL115A1 [mm]
  rect 1.05x0.55 smd: 1(-1.075,1.875)
  oval 1.05x0.55 smd: 2(-1.075,0.625) 3(-1.075,-0.625) 4(-1.075,-1.875) 5(1.075,-1.875) 6(1.075,-0.625) 7(1.075,0.625) 8(1.075,1.875)
  silkscreen extent -1.52,-2.5 1.52,2.5
"PC WIRE CONNECTOR" [mm]
  oval 2x2.5 hole 1.1: L(-2.5,0) R(2.5,0)
  Top Layer keep-out circle w0.1: c-2.5,0 r1.691
  Top Layer keep-out circle w0.1: c2.5,0 r1.611
  silkscreen extent -5,-5 5,4
"PLCC-4 LED" [mm]
  oct 1.2x1 smd: 1(-1.55,0.9) 2(1.55,0.9) 3(-1.55,-0.9) 4(1.55,-0.9)
  silkscreen extent -1.78,-1.4 1.75,1.4
RES12.2-8.5X3.3 [mm] "Resistor, Axial; Body 8.5 x 3.3 mm (LxDia. max), Lead Dia. 0.7 mm (max)"
  round 1.65 hole 1: 1(-6.1,0) 2(6.1,0)
  silkscreen extent -4.25,-1.65 4.25,1.65
"RESISTOR ARRAY YC164" [mm]
  oct 1x0.65 smd: 1(-1,1.275) 4(-1,-1.275) 5(1,-1.275) 8(1,1.275)
  oct 1x0.5 smd: 2(-1,0.4) 3(-1,-0.4) 6(1,-0.4) 7(1,0.4)
  Top Layer keep-out lines w0.1: 0,1.524 0,-1.524
  Mechanical 1 keep-out lines w0.1: 1.905,1.905 1.905,-1.905 -1.905,-1.905 -1.905,1.905 1.905,1.905
  silkscreen extent -0.38,-1.65 0.38,1.65
"RHT03 HUMIDITY SENSOR" [mm]
  rect 1.6x1.6 hole 0.6: 1(3.8,-2.54)
  round 1.6 hole 0.6: 2(6.34,-2.54) 3(8.88,-2.54) 4(11.42,-2.54)
  Top Layer keep-out lines w0.254: 12.827,-1.27 12.827,-3.81 2.413,-3.81 2.413,-1.27 12.827,-1.27
  silkscreen extent 0,-7.75 15.22,0
S25FL128P [mm]
  rect 0.5x0.4 smd: 1(-3.65,1.905)
  oval 0.5x0.4 smd: 2(-3.65,0.635) 3(-3.65,-0.635) 4(-3.65,-1.905) 5(3.65,-1.905) 6(3.65,-0.635) 7(3.65,0.635) 8(3.65,1.905)
  Top Layer region: -2.921,-2.159 2.921,-2.159 2.921,2.159 -2.921,2.159
  silkscreen extent -4.1,-3 4.1,3
"SG-636PCE 25.175MHZ CRYSTAL" [mm]
  rect 2.1x1.3 smd: 1(-2.3,2.54)
  oval 2.1x1.3 smd: 2(-2.3,-2.54) 3(2.3,-2.54) 4(2.3,2.54)
  silkscreen extent -2.63,-5.13 2.63,5.13
"SMD 0603" [mm]
  rect 0.9x0.8 smd: 1(-0.9,0) 2(0.9,0)
  Top Layer keep-out lines w0.1: 0.127,0.508 0.127,-0.508 ; -0.127,0.508 -0.127,-0.508
  silkscreen extent -1.6,-0.8 1.6,0.8
"SMD 0805" [mm]
  rect 1.05x1.3 smd: 1(-1.175,0) 2(1.175,0)
  Top Layer keep-out lines w0.2: -0.254,-0.635 -0.254,0.635 ; 0.254,-0.635 0.254,0.635
  silkscreen extent -2,-1 2,1
"SMD 1206" [mm]
  rect 1.25x1.7 smd: 1(-1.775,0) 2(1.775,0)
  Top Layer keep-out lines w0.2: -0.762,-0.889 -0.762,0.889 ; 0.762,-0.889 0.762,0.889
  silkscreen extent -2.8,-1.2 2.8,1.2
"SMD TACTILE SWITCH" [mm]
  oct 1.8x1.1 smd: 1(0,0) 1(6.2,0) 2(0,-3.7) 2(6.2,-3.7)
  Mechanical 1 keep-out lines w0.1: -1.651,1.27 7.62,1.27 7.62,-4.953 -1.651,-4.953 -1.651,1.27
  silkscreen extent 1.27,-3.17 5.08,-0.63
"TO-263 D2PACK" [mm]
  rect 2.3x1.19 smd: 1(0,2.413) 2(0,0) 3(0,-2.413)
  rect 7.696x6.502 smd: 2(10.338,0)
  silkscreen extent -1.5,-5.1 14.5,5.1
TQFP144_N [mm] "Thin QFP, 144-Leads, Body 20x20mm, Pitch 0.5mm, IPC Medium Density"
  oval 1.8x0.3 smd: 1(-10.55,8.75) 2(-10.55,8.25) 3(-10.55,7.75) 4(-10.55,7.25) 5(-10.55,6.75) 6(-10.55,6.25) 7(-10.55,5.75) 8(-10.55,5.25) 9(-10.55,4.75) 10(-10.55,4.25) 11(-10.55,3.75) 12(-10.55,3.25) 13(-10.55,2.75) 14(-10.55,2.25) 15(-10.55,1.75) 16(-10.55,1.25) 17(-10.55,0.75) 18(-10.55,0.25) 19(-10.55,-0.25) 20(-10.55,-0.75) 21(-10.55,-1.25) 22(-10.55,-1.75) 23(-10.55,-2.25) 24(-10.55,-2.75) 25(-10.55,-3.25) 26(-10.55,-3.75) 27(-10.55,-4.25) 28(-10.55,-4.75) 29(-10.55,-5.25) 30(-10.55,-5.75) 31(-10.55,-6.25) 32(-10.55,-6.75) 33(-10.55,-7.25) 34(-10.55,-7.75) 35(-10.55,-8.25) 36(-10.55,-8.75) 73(10.55,-8.75) 74(10.55,-8.25) 75(10.55,-7.75) 76(10.55,-7.25) 77(10.55,-6.75) 78(10.55,-6.25) 79(10.55,-5.75) 80(10.55,-5.25) 81(10.55,-4.75) 82(10.55,-4.25) 83(10.55,-3.75) 84(10.55,-3.25) 85(10.55,-2.75) 86(10.55,-2.25) 87(10.55,-1.75) 88(10.55,-1.25) 89(10.55,-0.75) 90(10.55,-0.25) 91(10.55,0.25) 92(10.55,0.75) 93(10.55,1.25) 94(10.55,1.75) 95(10.55,2.25) 96(10.55,2.75) 97(10.55,3.25) 98(10.55,3.75) 99(10.55,4.25) 100(10.55,4.75) 101(10.55,5.25) 102(10.55,5.75) 103(10.55,6.25) 104(10.55,6.75) 105(10.55,7.25) 106(10.55,7.75) 107(10.55,8.25) 108(10.55,8.75)
  oval 0.3x1.8 smd: 37(-8.75,-10.55) 38(-8.25,-10.55) 39(-7.75,-10.55) 40(-7.25,-10.55) 41(-6.75,-10.55) 42(-6.25,-10.55) 43(-5.75,-10.55) 44(-5.25,-10.55) 45(-4.75,-10.55) 46(-4.25,-10.55) 47(-3.75,-10.55) 48(-3.25,-10.55) 49(-2.75,-10.55) 50(-2.25,-10.55) 51(-1.75,-10.55) 52(-1.25,-10.55) 53(-0.75,-10.55) 54(-0.25,-10.55) 55(0.25,-10.55) 56(0.75,-10.55) 57(1.25,-10.55) 58(1.75,-10.55) 59(2.25,-10.55) 60(2.75,-10.55) 61(3.25,-10.55) 62(3.75,-10.55) 63(4.25,-10.55) 64(4.75,-10.55) 65(5.25,-10.55) 66(5.75,-10.55) 67(6.25,-10.55) 68(6.75,-10.55) 69(7.25,-10.55) 70(7.75,-10.55) 71(8.25,-10.55) 72(8.75,-10.55) 109(8.75,10.55) 110(8.25,10.55) 111(7.75,10.55) 112(7.25,10.55) 113(6.75,10.55) 114(6.25,10.55) 115(5.75,10.55) 116(5.25,10.55) 117(4.75,10.55) 118(4.25,10.55) 119(3.75,10.55) 120(3.25,10.55) 121(2.75,10.55) 122(2.25,10.55) 123(1.75,10.55) 124(1.25,10.55) 125(0.75,10.55) 126(0.25,10.55) 127(-0.25,10.55) 128(-0.75,10.55) 129(-1.25,10.55) 130(-1.75,10.55) 131(-2.25,10.55) 132(-2.75,10.55) 133(-3.25,10.55) 134(-3.75,10.55) 135(-4.25,10.55) 136(-4.75,10.55) 137(-5.25,10.55) 138(-5.75,10.55) 139(-6.25,10.55) 140(-6.75,10.55) 141(-7.25,10.55) 142(-7.75,10.55) 143(-8.25,10.55) 144(-8.75,10.55)
  silkscreen extent -10.67,-9.25 9.25,9.57, body extent -10,-10 10,10, height 1.6
TQFP-PF100_L [mm] "Thin QFP, 100-Leads, Body 14x14mm, Pitch 0.5mm, IPC High Density"
  oval 1.55x0.25 smd: 1(-7.525,6) 2(-7.525,5.5) 3(-7.525,5) 4(-7.525,4.5) 5(-7.525,4) 6(-7.525,3.5) 7(-7.525,3) 8(-7.525,2.5) 9(-7.525,2) 10(-7.525,1.5) 11(-7.525,1) 12(-7.525,0.5) 13(-7.525,0) 14(-7.525,-0.5) 15(-7.525,-1) 16(-7.525,-1.5) 17(-7.525,-2) 18(-7.525,-2.5) 19(-7.525,-3) 20(-7.525,-3.5) 21(-7.525,-4) 22(-7.525,-4.5) 23(-7.525,-5) 24(-7.525,-5.5) 25(-7.525,-6) 51(7.525,-6) 52(7.525,-5.5) 53(7.525,-5) 54(7.525,-4.5) 55(7.525,-4) 56(7.525,-3.5) 57(7.525,-3) 58(7.525,-2.5) 59(7.525,-2) 60(7.525,-1.5) 61(7.525,-1) 62(7.525,-0.5) 63(7.525,0) 64(7.525,0.5) 65(7.525,1) 66(7.525,1.5) 67(7.525,2) 68(7.525,2.5) 69(7.525,3) 70(7.525,3.5) 71(7.525,4) 72(7.525,4.5) 73(7.525,5) 74(7.525,5.5) 75(7.525,6)
  oval 0.25x1.55 smd: 26(-6,-7.525) 27(-5.5,-7.525) 28(-5,-7.525) 29(-4.5,-7.525) 30(-4,-7.525) 31(-3.5,-7.525) 32(-3,-7.525) 33(-2.5,-7.525) 34(-2,-7.525) 35(-1.5,-7.525) 36(-1,-7.525) 37(-0.5,-7.525) 38(0,-7.525) 39(0.5,-7.525) 40(1,-7.525) 41(1.5,-7.525) 42(2,-7.525) 43(2.5,-7.525) 44(3,-7.525) 45(3.5,-7.525) 46(4,-7.525) 47(4.5,-7.525) 48(5,-7.525) 49(5.5,-7.525) 50(6,-7.525) 76(6,7.525) 77(5.5,7.525) 78(5,7.525) 79(4.5,7.525) 80(4,7.525) 81(3.5,7.525) 82(3,7.525) 83(2.5,7.525) 84(2,7.525) 85(1.5,7.525) 86(1,7.525) 87(0.5,7.525) 88(0,7.525) 89(-0.5,7.525) 90(-1,7.525) 91(-1.5,7.525) 92(-2,7.525) 93(-2.5,7.525) 94(-3,7.525) 95(-3.5,7.525) 96(-4,7.525) 97(-4.5,7.525) 98(-5,7.525) 99(-5.5,7.525) 100(-6,7.525)
  silkscreen extent -7.65,-6.35 6.35,6.8, body extent -7,-7 7,7, height 1.2
"XBEE PRO S1 WIRELESS MODULE" [mm]
  rect 1.2x1.2 hole 0.6: 1(-11,9)
  round 1.2 hole 0.6: 2(-11,7) 3(-11,5) 4(-11,3) 5(-11,1) 6(-11,-1) 7(-11,-3) 8(-11,-5) 9(-11,-7) 10(-11,-9) 11(11,-9) 12(11,-7) 13(11,-5) 14(11,-3) 15(11,-1) 16(11,1) 17(11,3) 18(11,5) 19(11,7) 20(11,9)
  Top Layer keep-out lines w0.1: -11.938,-10.033 -9.906,-10.033 -9.906,9.906 -11.938,9.906 -11.938,-10.033 ; 9.906,-9.906 12.065,-9.906 12.065,10.033 9.906,10.033 9.906,-9.906
  silkscreen extent -12.19,-16 12.19,17
"XT9M20ANA8M - 8MHZ CAPACITOR" [mm]
  rect 6x2 smd: 1(-4.5,0) 2(4.5,0)
  silkscreen extent -5.7,-2.35 5.7,2.35

## Part data
BB JEPC: "Header, 5-Pin, Dual row"
C1 C3 C11 C14 C16 C18 C20 C30 C39 C41 C42 C44 C45 C46 C47 C48 C69 C73 C77: library part SMD_Cap_Tantalum, "Tantalum Capacitor - Case A"
C2 C4 C5 C6 C7 C8 C9 C12 C13 C15 C17 C19 C21 C22 C23 C24 C25 C26 C27 C28 C29 C31 C32 C33 C34 C35 C38 C40 C43 C49 C56 C57 C58 C59 C60 C61 C62 C63 C64 C65 C66 C67 C68 C70 C71 C72 C74 C75 C76 C78 C79: library part Cap, "Capacitor"
C10 C36 C37: library part "Cap Pol1", "Polarized Capacitor (Radial)"
D1 D3: "40V 5A Scottky Diode"
D2: "3.3V 1.5W Zener Diode"
Debug1 Debug4: library part "Header 4", "Header, 4-Pin"
Debug2 Debug3 Debug5 Debug6: library part "Header 3", "Header, 3-Pin"
FPGA1: "Cyclone II Family, 1.2V FPGA, 85 I/O Pins, 2 PLLs, 144-Pin TQFP, Speed Grade 8, Commercial Grade, Pb-Free"
H1: "DC Power Jack"
Header2: "Header, 6-Pin"
Header3 Header4 Header5 Header6: library part "Header 3H", "Header, 3-Pin, Right Angle"
Header7: "Header, 20-Pin, Dual row, Right Angle"
Header9: library part "PC Wire Connector"
"Header 8": library part "Header 6", "Header, 6-Pin"
IC1: "Three-Axis Digital Output MEMS Gyroscope"
IC2: "3-Axis, 12-bit/8-bit Digital Accelerometer"
IC3 IC4: "128MB 104-MHz SPI Flash Memory"
IC5: "Miniature SPI Digital Barometer"
IC6: "3-Axis Digital Compass IC"
IC7: "High Performance 80 MHz MIPS-Based 32-Bit Flash Microcontroller with USB, CAN and Ethernet, 512KB Program Memory, 100-pin TQFP, Industrial Temperature"
IC8: "16MB FPGA CONFIGURATION DEVICE"
IC9: "EconOscillator Frequency Synthesizer"
J1 J2 J3 J4 J5 J6: "Jumper Wire"
LED1 LED2: library part HSMF-C157, "Surface Mount Chip LED"
LED3: library part "SMD LED", "Surface Mount Chip LED"
Module3: "MicroSD SPI Interface"
Module4: "XBee Pro S1 60mW Wireless Module"
Module5: "Digital Humidity & Temp Sensor"
Module6: library part "Mini USB Connector"
R1 R2 R3 R6 R7 R8 R9 R10 R11 R12 R14 R15 R16 R17 R18 R19 R20 R21 R28: library part Res2, "Resistor"
R4 R5 R13 R27 R29 R30: library part "SMD Resistor Array", "4-Count Resistor Array"
REG1: "Dual 300mA LDO (Lead Free Compliant)"
REG2 REG4: "3.0A LDO Fixed Volt.(ROHS Compliant)"
REG3: "Dual Supply, LV 3.0A LDO(ROHS Compliant)"
S1: "DIP Switch"
S2 S3 S4: library part SW-SPST, "Single-Pole, Single-Throw Switch"
X1: "8MHz SMD Crystal"
X2: "32.768KHz 7pF SMD Crystal"
X3: "OSCILLATOR 25.1750MHZ SMD"

## Free pads (board coordinates)
  round 5 hole 3: MOUNT(53.7,53.7) MOUNT(53.7,98.7) MOUNT(98.7,53.7) MOUNT(98.7,98.7)

## Via types
v1: diameter 0.686, hole 0.381, Top Layer to Bottom Layer, 391 vias
v2: diameter 1.27, hole 0.711, Top Layer to Bottom Layer, 32 vias

## Nets (pads, with @x,y where several pads share a name; then routed paths per layer and width w, separated by ;. In a path a pad name is that pad's centre, name@x,y a point inside that pad or via, vN(x,y) a via of type N, cw(c..) or ccw(c..) an arc to the next point about the centre after c; other vN are vias at no path point)
25MHZ_CLOCK: FPGA1.17 X3.3 | length 10.4
  Top Layer w0.21: FPGA1.17@107.552,65.044 v1(107.552,73.054)
  Bottom Layer w0.254: X3.3@106.002,73.054 v1(107.552,73.054) ; v1@107.399,72.901 ccw(c107.03,72.532) 107.03,73.054 ccw(c107.03,73.575) v1@107.399,73.207
+1.2V: C46.1 C56.1 C60.1 C65.1 C70.1 C74.1 C76.1 C77.1 FPGA1.26 FPGA1.35 FPGA1.37 FPGA1.50 FPGA1.62 FPGA1.81 FPGA1.107 FPGA1.109 FPGA1.124 FPGA1.131 Header7.2 REG3.5 | length 305.4
  Top Layer w0.2: 100.052,84.344 FPGA1.109@98.243,84.344 ; FPGA1.109@98.243,84.344 v1(98.243,86.105) FPGA1.109@98.243,84.344
  Top Layer w0.21: v1(96.312,77.135) 96.603,76.844 ; v1@96.374,76.905 cw(c96.436,76.676) 96.603,76.844 ; v1@96.542,77.073 ccw(c96.771,77.012) 96.603,76.844 ; FPGA1.131@97.752,73.344 99.157,73.344 ; FPGA1.109@97.752,84.344 FPGA1.109@98.243,84.344 ; 100.052,85.187 FPGA1.107@100.052,86.144 ; 100.157,84.344 100.16,84.285 101.951,84.285 ; 100.478,73.344 99.157,73.344 ; 111.336,72.767 116.327,67.775 ; 113.052,74.537 FPGA1.81@113.052,86.144 113.052,87.322 ; v1@113.085,87.484 cw(c112.946,87.428) 113.052,87.322 ; v1@113.215,87.354 ccw(c113.158,87.216) 113.052,87.322 ; v1(113.305,87.575) 113.052,87.322 ; 114.245,73.344 115.413,73.344 117.438,73.344 ; 114.372,78.939 117.166,78.939 ; FPGA1.35@116.552,65.044 116.552,66.315 ; v1(116.594,78.367) 117.166,78.939 ; v1@116.594,78.605 ccw(c116.594,79.18) 117,78.773 ccw(c117.407,78.367) v1@116.832,78.367 ; v1@117.639,65.629 ccw(c117.064,65.629) 117.471,66.035 ccw(c117.877,66.442) v1@117.877,65.867 ; v1(117.877,65.629) 117.191,66.315 116.552,66.315 ; FPGA1.37@118.852,66.844 117.259,66.844 ; FPGA1.50@118.852,73.344 117.438,73.344 ; FPGA1.62@118.852,79.344 117.571,79.344 117.166,78.939 ; 96.603,76.844 FPGA1.124@97.752,76.844 98.94,76.844 99.487,76.297 99.487,73.674 99.157,73.344 ; FPGA1.107@100.052,86.144 100.052,84.344 FPGA1.107@100.052,86.144 ; 112.052,64.075 ccw(c112.627,64.075) 112.22,63.668 cw(c112.627,64.075) 112.052,64.075 ; 112.052,64.075 cw(c111.477,64.075) 111.884,63.668 ccw(c111.477,64.075) 112.052,64.075 ; 116.327,67.775 117.259,66.844 ; 116.327,67.775 116.327,72.233 117.438,73.344 ; 116.552,66.315 117.259,66.844 ; v1(112.052,61.362) FPGA1.26@112.052,65.044 v1(112.052,61.362)
  Top Layer w0.254: 100.157,84.344 102.261,84.344 102.278,83.959 ; 100.478,73.344 100.871,73.738 100.871,81.572 102.319,83.02 102.278,83.959 ; 101.951,84.285 102.278,83.959 ; 111.336,72.767 111.336,74.9 102.278,83.959 ; 113.052,74.537 114.245,73.344 ; v1(114.046,140.335) v1@114.113,140.335 ; 114.372,78.939 113.762,78.329 113.762,74.995 115.413,73.344
  Top Layer w0.4: v1@138.654,89.835 ccw(c138.41,90.079) 138.756,90.079 ccw(c139.101,90.079) v1@138.857,89.835 ; v1(138.756,89.734) 138.756,112.594 139.797,113.635
  Top Layer w0.5: 139.797,113.635 140.813,113.635 ; 142.164,113.674 142.202,113.635 v1(144.877,113.635)
  Top Layer w0.6: v1@114.113,140.335 140.774,113.674 142.164,113.674
  Bottom Layer w0.254: v1@96.175,76.968 cw(c95.936,76.678) 96.312,76.678 ; v1@96.42,77.322 ccw(c96.681,77.774) 96.816,77.27 ccw(c96.951,76.766) v1@96.499,77.027 ; v1@96.449,76.968 ccw(c96.688,76.678) 96.312,76.678 ; v1@96.465,76.982 cw(c96.834,76.614) 96.834,77.135 cw(c96.834,77.657) v1@96.465,77.288 ; 96.753,77.135 ccw(c96.753,77.913) C56.1@97.426,77.523 ; C56.1@97.206,77.65 cw(c96.312,78.168) v1(96.312,77.135) ; C65.1@97.454,72.98 ccw(c97.348,73.249) 97.637,73.249 ; C65.1@97.637,72.292 97.637,73.249 ; C56.1@97.637,77.626 C56.1@97.637,77.135 ; C65.1@97.82,72.98 cw(c97.926,73.249) 97.637,73.249 ; v1(98.243,86.105) 98.838,86.7 ; 98.751,86.7 98.838,86.7 ; C77.1@99.654,86.507 ccw(c99.188,86.041) 99.188,86.7 ccw(c99.188,87.359) C77.1@99.654,86.893 ; C77.1@100.047,86.7 98.838,86.7 ; C70.1@110.969,64.929 110.969,64.807 v1@112.052,63.724 ; C70.1@111.194,64.431 cw(c111.194,64.066) C70.1@111.452,64.324 ; C70.1@111.435,64.891 ccw(c112.366,64.743) 111.699,64.076 ; 111.525,64.251 cw(c110.774,63.5) v1@111.836,63.5 ; C70.1@111.686,64.851 ccw(c112.974,64.647) v1@112.052,63.724 ; 111.753,64.242 cw(c110.97,63.79) v1@111.843,63.556 ; v1(112.052,61.362) 115.619,64.929 C74.1@116.303,64.929 117.177,64.929 ; v1(112.052,63.5) v1@112.052,63.724 ; C76.1@112.62,86.259 C76.1@113.305,86.259 ; C76.1@113.283,86.022 cw(c113.681,85.807) 113.681,86.259 ; C76.1@113.283,86.496 ccw(c113.681,86.711) 113.681,86.259 ; v1(114.046,140.335) 114.113,140.335 v1@114.168,140.28 ; C74.1@116.524,64.92 ccw(c116.803,65.615) 117.333,65.085 ; v1(116.594,78.367) 116.835,78.126 118.662,78.126 118.967,77.821 ; C74.1@116.619,65.155 ccw(c116.959,66.003) 117.605,65.357 ; C74.1@116.714,65.391 ccw(c117.115,66.391) v1(117.877,65.629) 117.177,64.929 ; C74.1@117.009,64.8 cw(c117.177,64.755) 117.177,64.929 ; C74.1@117.009,65.058 ccw(c117.177,65.103) 117.177,64.929 ; 117.267,65.162 ccw(c116.836,65.908) 117.668,65.685 cw(c117.164,65.82) 117.425,65.368 cw(c117.686,64.917) v1@117.821,65.42 ; C60.1@118.719,77.394 ccw(c118.475,77.821) 118.967,77.821 ; C60.1@118.967,76.737 118.967,77.821 ; C60.1@119.214,77.394 cw(c119.459,77.821) 118.967,77.821 ; v1(138.756,89.734) 137.194,88.172 128.049,88.172 126.881,87.003 122.22,87.003 121.001,88.222 120.112,88.222 116.645,84.755 113.991,84.755 113.991,85.949 113.681,86.259 ; 96.312,76.678 95.576,75.941 95.576,74.196 96.269,73.503 97.383,73.503 97.637,73.249 ; 96.312,76.678 v1(96.312,77.135) ; v1(96.312,77.135) C56.1@97.637,77.135 ; C56.1@97.637,77.135 97.016,77.135 C56.1@97.637,77.135 ; C76.1@113.305,86.259 v1(113.305,87.575) C76.1@113.305,86.259 ; C76.1@113.305,86.259 113.681,86.259 ; 113.305,87.053 ccw(c112.783,87.053) 113.152,87.422 cw(c112.783,87.053) 113.305,87.053 ; 113.305,87.053 cw(c113.826,87.053) 113.458,87.422 ccw(c113.826,87.053) 113.305,87.053
  Bottom Layer w0.5: v1(144.877,113.635) 144.877,112.298 Header7.2@145.415,111.76
  Bottom Layer w0.6: C46.1@93.618,134.336 93.618,137.842 93.704,137.928 REG3.5@93.704,138.4
  Bottom Layer w0.7: REG3.5@93.704,138.4 93.704,138.891 95.093,140.28 ; 95.093,140.28 114.168,140.28 95.093,140.28
+1.5V: C44.1 Header7.4 REG1.7 | length 33.7
  Top Layer w0.17: REG1.7@133.862,116.103 133.862,118.495 ; v1@133.883,118.627 cw(c133.782,118.575) 133.862,118.495 ; v1@133.994,118.516 ccw(c133.942,118.415) 133.862,118.495 ; v1(134.112,118.745) 133.862,118.495
  Top Layer w0.254: v1@134.112,118.567 v1(134.112,118.745)
  Bottom Layer w0.254: C44.1@133.862,117.83 ccw(c133.396,118.296) 134.055,118.296 ccw(c134.714,118.296) C44.1@134.248,117.83 ; v1@133.959,118.592 cw(c133.728,118.361) 134.055,118.361 ; C44.1@134.055,117.437 v1@134.055,118.51 ; 134.055,118.086 cw(c134.771,118.086) v1@134.265,118.592 ; v1(134.112,118.745) 134.112,118.567 v1@134.055,118.51 ; Header7.4@145.415,109.22 144.14,110.495 144.14,116.835 142.466,118.51 ; v1@134.055,118.51 142.466,118.51 ; v1@134.055,118.51 142.466,118.51
+2.8V: C42.1 C57.1 C61.1 C66.1 C69.1 FPGA1.77 FPGA1.95 FPGA1.102 Header7.6 REG1.8 | length 186.4
  Top Layer w0.17: v1(132.01,117.291) 132.534,117.291 133.362,116.463 REG1.8@133.362,116.103
  Top Layer w0.21: v1@102.392,90.531 cw(c102.007,90.145) 102.552,90.145 ; 102.552,90.103 cw(c103.156,90.103) v1@102.729,90.531 ; 103.533,83.79 102.552,84.771 FPGA1.102@102.552,86.144 v1@102.552,90.69 ; 105.417,83.79 106.052,84.425 FPGA1.95@106.052,86.144 ; FPGA1.77@115.052,86.144 v1@115.052,88.153 ; 115.052,87.391 cw(c116.079,87.391) v1@115.353,88.118 ; 115.052,87.898 cw(c115.572,87.898) v1@115.204,88.266 ; v1@102.552,90.69 102.552,91.852 v1@102.552,90.69
  Top Layer w0.254: v1@102.552,90.69 v1(102.561,90.699) ; 102.757,92.057 ccw(c102.547,92.267) v1@102.844,92.267 ; v1@103.054,92.051 ccw(c103.033,91.371) 102.552,91.852 102.967,92.267 v1(103.06,92.267) ; 103.533,83.79 105.417,83.79 ; v1(106.269,95.017) 106.472,95.017 v1(110.079,91.41) ; v1@115.052,88.153 v1(115.184,88.286) ; v1@132.01,117.11 v1(132.01,117.291)
  Bottom Layer w0.254: v1@102.367,90.604 cw(c102.083,90.465) 102.306,90.242 ; C69.1@102.457,86.46 cw(c102.339,86.242) 102.587,86.242 ; v1(102.561,90.699) 102.561,90.496 102.306,90.242 ; C69.1@102.717,86.46 ccw(c102.835,86.242) 102.587,86.242 ; v1(103.06,92.267) 103.919,93.126 104.379,93.126 v1(106.269,95.017) ; v1@103.06,92.483 ccw(c103.06,93.005) 103.429,92.636 ccw(c103.797,92.267) v1@103.276,92.267 ; v1@106.053,95.017 cw(c105.532,95.017) 105.9,94.648 cw(c106.269,94.279) v1@106.269,94.801 ; C57.1@108.683,86.259 107.353,86.259 107.336,86.242 C66.1@106.016,86.242 ; v1(110.079,91.41) 112.426,91.41 116.274,95.258 139.784,95.258 142.312,97.785 143.353,97.785 143.759,97.379 144.318,97.379 ; C42.1@131.817,116.433 ccw(c131.351,116.899) 132.01,116.899 ccw(c132.669,116.899) C42.1@132.203,116.433 ; v1@131.857,117.138 cw(c131.489,116.77) 132.01,116.77 cw(c132.531,116.77) v1@132.163,117.138 ; v1(132.01,117.291) C42.1@132.01,116.04 C42.1@132.01,115.845 ; C69.1@102.306,86.7 102.306,90.242 ; C69.1@102.306,86.7 102.306,90.242 ; C69.1@102.306,86.7 C69.1@102.587,86.7 102.587,86.242 ; 102.587,86.242 C66.1@106.016,86.242 ; 102.587,86.242 C66.1@106.016,86.242 ; 104.589,86.242 ccw(c104.589,87.444) 105.439,86.594 cw(c104.589,87.444) 104.589,86.242 ; 104.589,86.242 cw(c104.589,85.04) 105.439,85.89 ccw(c104.589,85.04) 104.589,86.242 ; C61.1@115.184,86.259 v1(115.184,88.286) C61.1@115.184,86.259 ; C61.1@115.184,86.259 C61.1@115.414,86.259 115.582,86.259 118.776,89.453 120.335,89.453 123.092,92.21 125.992,92.21 126.683,92.901 143.65,92.901 144.318,93.569 144.318,97.379 ; 115.184,87.764 ccw(c114.663,87.764) 115.032,88.133 cw(c114.663,87.764) 115.184,87.764 ; 115.184,87.764 cw(c115.706,87.764) 115.337,88.133 ccw(c115.706,87.764) 115.184,87.764 ; C42.1@132.01,115.845 132.736,115.845 ; C42.1@132.01,115.845 132.736,115.845 ; 132.736,115.845 135.225,113.356 138.273,113.356 139.446,112.183 139.446,108.966 140.589,107.823 144.272,107.823 Header7.6@145.415,106.68 147.011,105.084 147.011,99.055 145.893,97.938 144.877,97.938 144.318,97.379 ; C69.1@102.194,86.893 ccw(c101.922,87.165) 102.306,87.165 cw(c101.922,87.165) C69.1@102.194,86.893 ; 102.306,87.554 ccw(c103.241,87.554) 102.58,86.893 cw(c103.241,87.554) 102.306,87.554 ; C69.1@102.441,86.354 ccw(c102.712,86.625) 102.712,86.242 cw(c102.712,86.625) C69.1@102.441,86.354 ; 102.587,86.2 cw(c102.814,86.2) 102.802,86.427 ccw(c102.814,86.2) 102.587,86.2 ; C69.1@102.621,86.534 ccw(c103.325,87.238) 103.325,86.242 cw(c103.325,87.238) C69.1@102.621,86.534 ; C69.1@102.8,86.713 ccw(c103.939,87.852) 103.939,86.242 cw(c103.939,87.852) C69.1@102.8,86.713 ; C69.1@102.98,86.893 ccw(c104.552,88.465) 104.552,86.242 cw(c104.552,88.465) C69.1@102.98,86.893 ; C61.1@114.837,86.611 ccw(c113.998,87.45) 115.184,87.45 cw(c113.998,87.45) C61.1@114.837,86.611 ; 115.184,87.472 ccw(c116.402,87.472) 115.541,86.611 cw(c116.402,87.472) 115.184,87.472 ; C42.1@132.203,115.647 cw(c132.681,115.169) 132.681,115.845 ccw(c132.681,115.169) C42.1@132.203,115.647 ; C42.1@132.203,116.033 ccw(c132.658,116.488) 132.658,115.845 cw(c132.658,116.488) C42.1@132.203,116.033